# Altium PCB MSPCamLoRaShield.PcbDoc
Units mil, origin at the board's own origin, x right, y up, seen from the top; angles counter-clockwise.
Board outline 2295 x 2025 mil, 2 copper layers (Top Layer, Bottom Layer); 35 components, 40 nets, 166 pads, 20 vias.
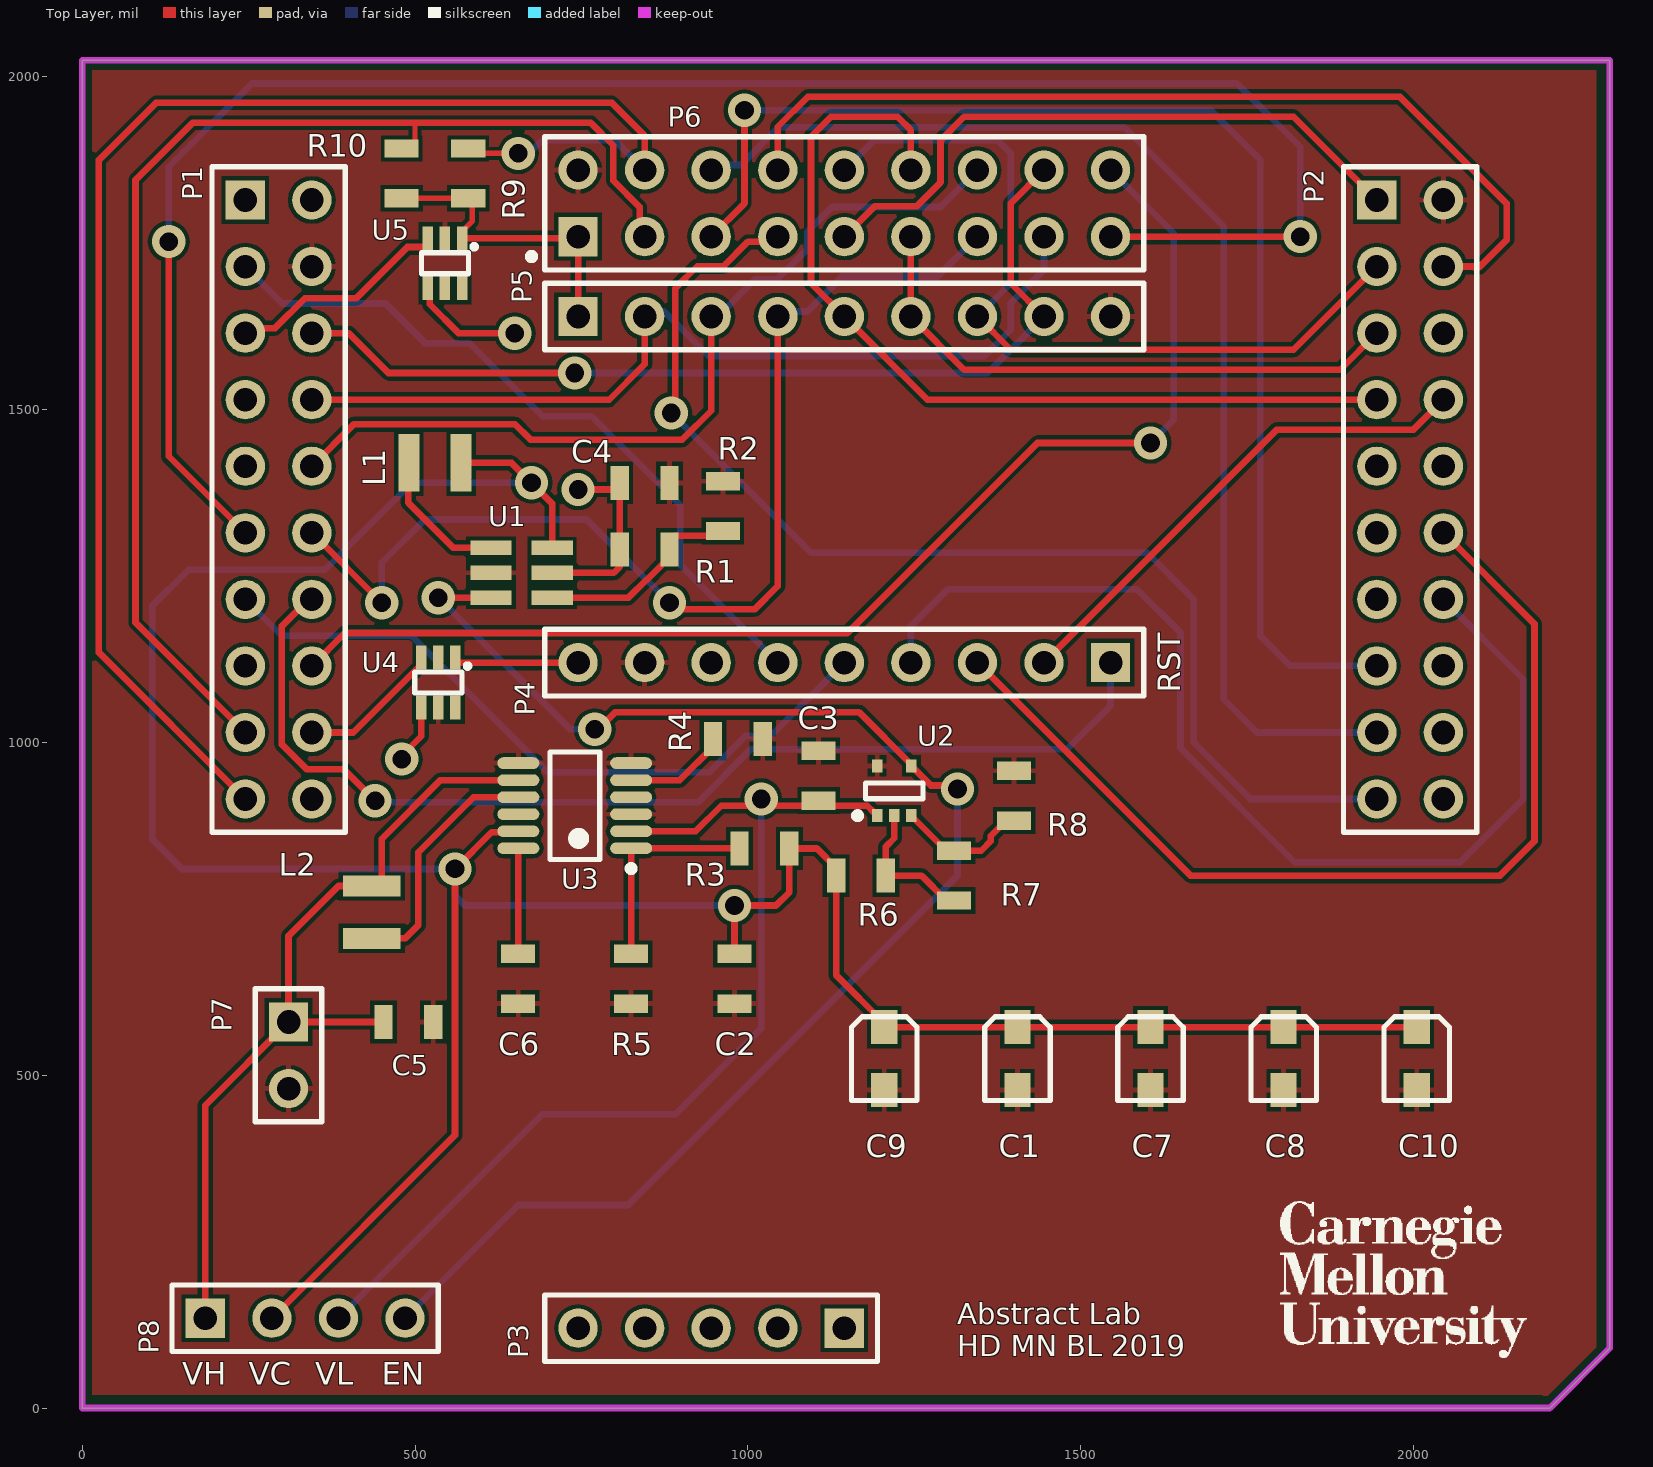
[diagram p0: Top Layer view]
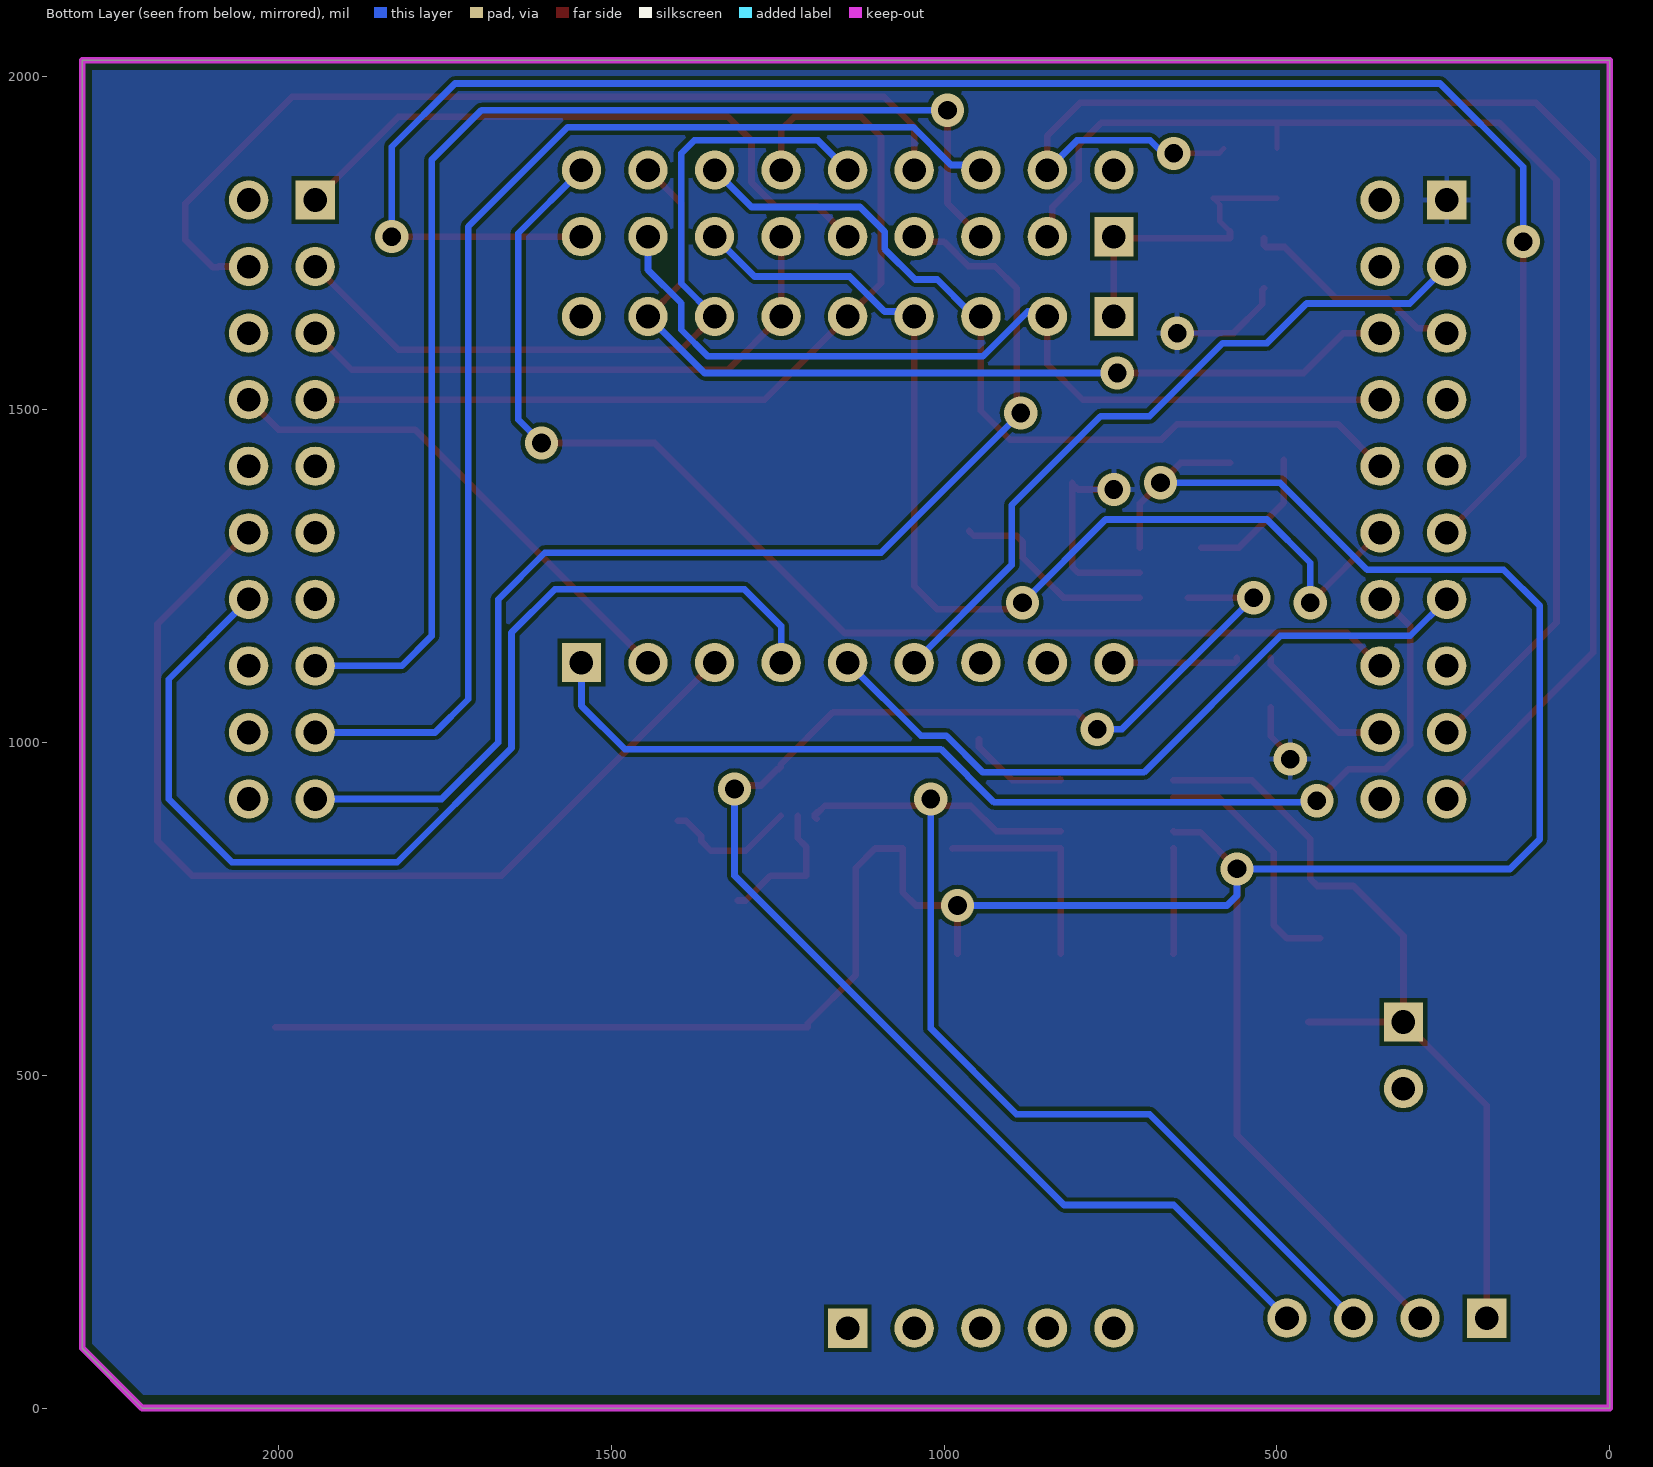
[diagram p1: Bottom Layer view, seen from below]

## Layer stack, top to bottom
Top Solder: solder mask 0.4, Solder Resist, Dk 3.5
Top Layer: signal copper 1.4
Dielectric 1: dielectric 12.6, FR-4, Dk 4.8
Bottom Layer: signal copper 1.4
Bottom Solder: solder mask 0.4, Solder Resist, Dk 3.5

## Board outline
0,2025 2295,2025 2295,90 2205,0 0,0

## Design rules (kind name [scope] priority, off if disabled: settings)
BoardOutlineClearance [All] p1: gap=15 ignorepadtopadclearanceinfootprint=FALSE
Clearance [All] p1: gap=6 ignorepadtopadclearanceinfootprint=FALSE except(0: Arc-Hole Track-Hole SMDPad-Hole THPad-Hole Via-Hole Fill-Hole Poly-Hole Region-Hole Text-Hole)
ComponentClearance [All] p1: gap=1 collisioncheckmode=3 verticalgap=1 showdistances=FALSE
DiffPairsRouting [All] p1: maxlimit=393.7 minlimit=6 mostfreqgap=8 toplayer_minwidth=6 toplayer_maxwidth=15 toplayer_prefwidth=8 bottomlayer_minwidth=6 bottomlayer_maxwidth=15 bottomlayer_prefwidth=8 maxuncoupledlength=500
HoleSize [All] p1: absolutevalues=TRUE maxlimit=265 minlimit=13 maxpercent=80.000 minpercent=20.000
HoleToHoleClearance [All] p1: gap=10 allowstackedmicrovias=FALSE
MinimumAnnularRing [All] p1: minimumring=7
MinimumSolderMaskSliver [All] p1: minsoldermaskwidth=0
PlaneClearance [All] p1: clearance=10
PlaneConnect [All] p1: planeconnectstyle=Direct reliefexpansion=16 reliefentries=4 reliefconductorwidth=6 reliefairgap=6
PolygonConnect [All] p1: connectstyle=Relief reliefconductorwidth=8 reliefentries=4 polygonreliefangle="90 Angle" airgapwidth=6
RoutingCorners [All] p1: cornerstyle=45-Degree minsetback=49.21 maxsetback=49.21
RoutingVias [All] p1: holewidth=15 width=30 viastyle="Through Hole" minholewidth=13 minwidth=27 maxholewidth=100 maxwidth=114
SilkToSilkClearance [All] p1: silktosilkclearance=0
SilkToSolderMaskClearance [IsPad] p1: minsilkscreentomaskgap=6 clearancetoexposedcopper=TRUE
SolderMaskExpansion [All] p1: expansion=2.95
Width [All] p1: maxlimit=400 minlimit=6 preferedwidth=8
20 further rules are at their usual default settings.

## Classes and differential pairs
component class ShieldConnections: P1 P2 P3 P4 P5 P6 R9 R10 U4 U5
component class Power: C1 C2 C3 C4 C5 C6 C7 C8 C9 C10 L1 L2 P7 P8 R1 R2 R3 R4 R5 R6 R7 R8 U1 U2 U3

## Components (designator, comment, footprint, x,y, rotation, side; value= is the part's Value field where it differs from the comment)
C1 "Cap - Polarized" CAP_CPH3225A 1405,525 r270 top value=7.5mF
C2 "Cap" 0805 980,645 r90 top value=10uF
C3 "Cap" 0805 1106.38,950 r270 top value=4.7uF
C4 "Cap" 0805 845,1390 r180 top value=10uF
C5 "Cap" 0805 490,580 r180 top value=10uF
C6 "Cap" 0805 655,645 r90 top value=1uF
C7 "Cap - Polarized" CAP_CPH3225A 1605,525 r270 top value=7.5mF
C8 "Cap - Polarized" CAP_CPH3225A 1805,525 r270 top value=7.5mF
C9 "Cap - Polarized" CAP_CPH3225A 1205,525 r270 top value=7.5mF
C10 "Cap - Polarized" CAP_CPH3225A 2005,525 r270 top value=7.5mF
L1 "Ind" 1008 530,1420 r180 top value=4.7uH
L2 "Ind" 1008 435,745 r270 top value=10uH
P1 "Header 10X2A" HDR2X10_CEN 245,1815 r270 top
P2 "Header 10X2A" HDR2X10_CEN 1945,1815 r270 top
P3 "Header 5" HDR1X5 1145,120 r180 top
P4 "Header 9" HDR1X9 1545,1120 r180 top
P5 "Header 9" HDR1X9 745,1640 r0 top
P6 "Header 9X2A" HDR2X9_CEN 745,1760 r0 top
P7 "Header 2" HDR1X2 310,580 r270 top
P8 "Header 4" HDR1X4 185,135 r0 top
R1 "Res" 0805 845,1290 r180 top value=1k
R2 "Res" 0805 962.5,1355 r270 top value=1k
R3 "Res" 0805 1025,840.67 r180 top value=1k
R4 "Res" 0805 985,1005 r0 top value=40.2k
R5 "Res" 0805 824.65,645 r270 top value=1k
R6 "Res" 0805 1170,800 r180 top value=1k
R7 "Res" 0805 1310,800 r270 top value=1k
R8 "Res" 0805 1400,920 r270 top value=1k
R9 "Res" 0805 580,1855 r270 top value=2.2k
R10 "Res" 0805 480,1855 r270 top value=2.2k
U1 "TPS61070DDCR" DDC0006A_N 660,1255 r0 top
U2 "MIC841" SC-70-5 1260,872.4 r90 top
U3 "LTC3105EMS#PBF" LT-MS-12_N 740,905 r180 top
U4 "SIP32413" SC70-6 535,1090 r180 top
U5 "SIP32413" SC70-6 545,1720 r180 top

## Footprints (in the part's own frame and the unit in brackets; to place one, negate y for a bottom-side part, rotate by r counter-clockwise, add the part's x,y. Pads: shape width x height; smd on the part's side, far side on the other; paste and mask are expansions set on the pad)
0805 [mm] "Surface Mount; Body 2.0 x 1.25 mm (LxW typ)"
  rect 0.7x1.3 smd: 1(-0.95,0) 2(0.95,0)
  body extent -1,-0.63 1,0.63, height 1.25
1008 [mm] "Surface Mount; Body 2.0 x 1.25 mm (LxW typ)"
  rect 0.8x2.2 smd: 1(-1,0) 2(1,0)
  body extent -1.4,-1.14 1.4,1.14, height 1.25
CAP_CPH3225A [mm]
  rect 1.3x1 smd: 1(-1.2,0) 2(1.2,0)
  silkscreen extent -1.6,-1.25 1.6,1.25
DDC0006A_N [mil]
  rect 62x22 smd: 1(-46,37.4) 2(-46,0) 3(-46,-37.4) 4(46,-37.4) 5(46,0) 6(46,37.4)
HDR1X2 [mm] "Connector; Header; 2 Position"
  rect 1.5x1.5 hole 0.9: 1(0,0)
  round 1.5 hole 0.9: 2(2.54,0)
  silkscreen extent -1.27,-1.27 3.81,1.27
HDR1X4 [mm] "Connector; Header; 4 Position"
  rect 1.5x1.5 hole 0.9: 1(0,0)
  round 1.5 hole 0.9: 2(2.54,0) 3(5.08,0) 4(7.62,0)
  silkscreen extent -1.27,-1.27 8.89,1.27
HDR1X5 [mm] "Connector; Header; 5 Position"
  rect 1.5x1.5 hole 0.9: 1(0,0)
  round 1.5 hole 0.9: 2(2.54,0) 3(5.08,0) 4(7.62,0) 5(10.16,0)
  silkscreen extent -1.27,-1.27 11.43,1.27
HDR1X9 [mm] "Connector; Header; 9 Position"
  rect 1.5x1.5 hole 0.9: 1(0,0)
  round 1.5 hole 0.9: 2(2.54,0) 3(5.08,0) 4(7.62,0) 5(10.16,0) 6(12.7,0) 7(15.24,0) 8(17.78,0) 9(20.32,0)
  silkscreen extent -1.27,-1.27 21.59,1.27
HDR2X9_CEN [mm] "Connector; Header; 9x2 Position"
  rect 1.5x1.5 hole 0.9: 1(0,0)
  round 1.5 hole 0.9: 2(2.54,0) 3(5.08,0) 4(7.62,0) 5(10.16,0) 6(12.7,0) 7(15.24,0) 8(17.78,0) 9(20.32,0) 10(0,2.54) 11(2.54,2.54) 12(5.08,2.54) 13(7.62,2.54) 14(10.16,2.54) 15(12.7,2.54) 16(15.24,2.54) 17(17.78,2.54) 18(20.32,2.54)
  silkscreen extent -1.27,-1.27 21.59,3.81
HDR2X10_CEN [mm] "Connector; Header; 10x2 Position"
  rect 1.5x1.5 hole 0.9: 1(0,0)
  round 1.5 hole 0.9: 2(2.54,0) 3(5.08,0) 4(7.62,0) 5(10.16,0) 6(12.7,0) 7(15.24,0) 8(17.78,0) 9(20.32,0) 10(22.86,0) 11(0,2.54) 12(2.54,2.54) 13(5.08,2.54) 14(7.62,2.54) 15(10.16,2.54) 16(12.7,2.54) 17(15.24,2.54) 18(17.78,2.54) 19(20.32,2.54) 20(22.86,2.54)
  silkscreen extent -1.27,-1.27 24.13,3.81
LT-MS-12_N [mm] "SOP, 12-Leads, Body 4.1x3.1mm, Pitch 0.65mm, IPC Medium Density"
  oval 1.6x0.45 smd: 1(-2.15,1.625) 2(-2.15,0.975) 3(-2.15,0.325) 4(-2.15,-0.325) 5(-2.15,-0.975) 6(-2.15,-1.625) 7(2.15,-1.625) 8(2.15,-0.975) 9(2.15,-0.325) 10(2.15,0.325) 11(2.15,0.975) 12(2.15,1.625)
  silkscreen extent -2.28,-2.05 0.95,2.52, body extent -1.55,-2.05 1.55,2.05, height 1.1
SC70-6 [mm] "SC70-6"
  rect 0.4x0.92 smd: 1(-0.65,-0.95) 2(0,-0.95) 3(0.65,-0.95) 4(0.65,0.95) 5(0,0.95) 6(-0.65,0.95)
  silkscreen extent -1.2,-0.71 0.9,0.4, body extent -0.9,-0.4 0.9,0.4, height 1.1
SC-70-5 [mm]
  rect 0.5x0.4 smd: 1(0.447,1.666) 2(0.447,1.016) 3(0.447,0.366) 4(2.347,0.366) 5(2.347,1.666)
  silkscreen extent 0.32,-0.08 1.7,2.54, body extent 0.2,-0.08 2.6,2.12, height 1.1

## Part data
C1 C7 C8 C9 C10: "Polarized Capacitor"
C2 C3 C4 C5 C6: "Ceramic Capacitor (Surface Mount)", Manufacturer="Generic Ceramic Chip Cap (TBD)"
L1 L2: library part "Ind - Power", "Power Inductor for DC-DC convters (RF switching freq)"
P1 P2: "Header, 10-Pin, Dual row", LatestRevisionDate=17-Jul-2002, LatestRevisionNote="Re-released for DXP Platform.", Publisher="Altium Limited"
P3: "Header, 5-Pin", LatestRevisionDate=17-Jul-2002, LatestRevisionNote="Re-released for DXP Platform.", Publisher="Altium Limited"
P4 P5: "Header, 9-Pin", LatestRevisionDate=17-Jul-2002, LatestRevisionNote="Re-released for DXP Platform.", Publisher="Altium Limited"
P6: "Header, 9-Pin, Dual row", LatestRevisionDate=17-Jul-2002, LatestRevisionNote="Re-released for DXP Platform.", Publisher="Altium Limited"
P7: "Header, 2-Pin", LatestRevisionDate=17-Jul-2002, LatestRevisionNote="Re-released for DXP Platform.", Publisher="Altium Limited"
P8: "Header, 4-Pin", LatestRevisionDate=17-Jul-2002, LatestRevisionNote="Re-released for DXP Platform.", Publisher="Altium Limited"
R1 R2 R3 R4 R5 R6 R7 R8 R9 R10: "Chip Resistor (Surface Mount)", Manufacturer="Generic Chip Res (TBD)"
U1: Manufacturer="Texas Instruments", Package=DDC0006A_N, PartNumber=TPS61070DDC, COMPTYPE=IC, DeviceSetName=TPS61070DDCR, GateName_1=A, LibraryName=TPS61070, MOUNTTYPE=SMT, PackageReference=DDC0006A, PIN_COUNT=6, REFDES=RefDes, RoHS=Y, SymbolName_1=TPS61070DDC, TYPE=TYPE
U3: library part CMP-0473-00104-1, "400 mA Step-Up DC/DC Converter with Maximum Power Point Control and 250 mV Start-Up, 12-pin SOP (MS-12), -40 to 85 degC, Pb-Free", Manufacturer="Linear Technology", ComponentLink1Description="Manufacturer URL", ComponentLink1URL=http://www.linear.com/, ComponentLink2Description=Datasheet, ComponentLink2URL=http://cds.linear.com/docs/en/datasheet/3105fa.pdf, ComponentLink3Description="Package Specification", ComponentLink3URL=http://cds.linear.com/docs/en/packaging/05081668_A_MS12.pdf, DatasheetVersion="Rev. A", Energy Source=Solar, Mounting Technology="Surface Mount", Number of Outputs=1, PackageDescription="12-Pin Plastic MSOP, Body 4.039 x 3 mm, Pitch 0.65 mm", PackageReference=MS-12, PackageVersion="Rev. A, 05/2013", PartNumber=LTC3105EMS#PBF, RoHS=TRUE, Topology=Boost, Vin Max(V)=5, Vin Min(V)=0.225, Vout Max(V)=5.25
U4 U5: library part SIP32431
U2: Name=MIC841

## Via types
v1: diameter 50, hole 28, Top Layer to Bottom Layer, 20 vias

## Nets (pads, with @x,y where several pads share a name; then routed paths per layer and width w, separated by ;. In a path a pad name is that pad's centre, name@x,y a point inside that pad or via, vN(x,y) a via of type N, cw(c..) or ccw(c..) an arc to the next point about the centre after c; other vN are vias at no path point)
CAMERAVCC: P5.1 P6.1 R9.2 R10.2 U5.1 | length 471
  Top Layer w8: R10.2@500,1817.6 595.56,1817.6 585.78,1807.82 585.78,1782.83 U5.1@570.59,1767.64 ; R9.2@570.56,1817.6 R9.2
  Top Layer w10: U5.1@570.59,1767.64 U5.1 742.4,1757.4 P6.1 P5.1
GND: C1.2 C2.1 C3.1 C4.1 C5.1 C6.1 C7.2 C8.2 C9.2 C10.2 P1.12 P2.11 P4.8 P5.9 P6.10 P7.2 R2.1 R4.2 R5.2 R8.1 U1.2 U2.5 U3.3 U3.6 U3.7 U4.2 U4.5 U5.2 U5.5
IPBoost-FB: R3.2 R5.1 U3.1 | length 321.7
  Top Layer w10: R5.1 U3.1 987.24,841.02 R3.2
IPBoost-MPPC: R4.1 U3.5 | length 157.5
  Top Layer w10: U3.5@826.12,944.86 U3.5 897.8,943.39 947.6,993.19 R4.1
NetC6_2: C6.2 U3.12 | length 159.3
  Top Layer w10: C6.2@655.35,682.76 C6.2 655,840.67 U3.12
NetL2_2: L2.2 U3.9 | length 372.3
  Top Layer w10: L2.2 485,705.63 505,725.63 505,835 587.8,917.8 U3.9
NetR6_1: R6.1 R7.2 U2.2 | length 213.3
  Top Layer w10: U2.2 1220,856.14 1207.4,843.54 R6.1 1260.79,800 1298.19,762.6 R7.2
NetR7_1: R7.1 R8.2 U2.3 | length 199.4
  Top Layer w10: U2.3 1298.19,837.4 R7.1 1350.59,837.4 1365,851.81 1365,859.41 1388.19,882.6 R8.2
OPBoostFB: R1.1 R2.2 U1.4 | length 311.8
  Top Layer w10: U1.4 820.78,1217.6 847.59,1244.41 848.62,1244.41 882.4,1278.19 R1.1 882.4,1301.81 891.18,1310.59 955.49,1310.59 R2.2
OPBoostSW: L1.2 U1.1 | length 217
  Top Layer w10: L1.2@490,1425 490,1360 557.6,1292.4 U1.1
P1.2: P1.2 P4.6 | length 1099.2
  Bottom Layer w10: P1.2 300.47,1659.53 455.47,1659.53 515,1600 581.57,1600 691.57,1490 765,1490 898.59,1356.41 898.59,1266.41 P4.6
P1.3: P1.6 P6.9 | length 2808.8
  Top Layer w10: v1(130,1752.5) 130,1430 P1.6 ; P6.9 v1(1830,1760)
  Bottom Layer w10: v1(130,1752.5) 130,1865 255,1990 1735,1990 1830,1895 v1(1830,1760)
P1.4: P1.17 P4.1 | length 1645.6
  Top Layer w10: P1.17 340,1215 300,1175 300,997.03 337.5,959.53 393.07,959.53 v1(440,912.6)
  Bottom Layer w10: v1(440,912.6) 447.4,912.6 450,910 925,910 1005,990 1480,990 1545,1055 P4.1
P1.5: P1.18 P6.18 | length 1862.6
  Top Layer w10: P1.18 394.53,1164.53 1149.53,1164.53 1435,1450 v1(1605,1450)
  Bottom Layer w10: P6.18 1640,1765 1640,1485 v1(1605,1450)
P3.0: P1.13 P5.8 P6.17 | length 1421.5
  Top Layer w10: P1.13 400,1615 460,1555 v1(740,1555) ; P5.8 1395,1690 1395,1810 P6.17
  Bottom Layer w10: v1(740,1555) 1360,1555 P5.8
P3.1: P1.14 P5.2 P6.8 | length 1352.1
  Top Layer w10: P1.14 791.72,1515 845,1568.28 P5.2
  Bottom Layer w10: P5.2 852.5,1647.5 874.53,1647.5 942.03,1580 1355,1580 1395,1620 1395,1660 1445,1710 P6.8
P3.2: P1.15 P5.3 P6.16 | length 1301.8
  Top Layer w10: P1.15 408.31,1478.31 649.92,1478.31 673.23,1455 901.57,1455 945,1498.43 P5.3
  Bottom Layer w10: P5.3 952.5,1647.5 962.5,1647.5 1010.47,1695.47 1043.44,1695.47 1089.53,1741.56 1089.53,1767.5 1126.56,1804.53 1289.53,1804.53 P6.16
P3.3: P1.16 P5.4 P6.7 | length 1668.8
  Top Layer w10: P1.16 v1(450,1210) ; v1(882.4,1210) 892.4,1200 1010,1200 1045,1235 P5.4 ; P6.7@1345,1746.73 P6.7
  Bottom Layer w10: v1(450,1210) 450,1270 515,1335 757.4,1335 v1(882.4,1210) ; P5.4 1052.5,1647.5 1089.53,1647.5 1142.03,1700 1285,1700 P6.7
P3.4: P2.4 P5.5 P6.15 | length 1373.2
  Top Layer w10: P6.15 1245,1920 1225,1940 1125,1940 1095,1910 1095,1690 P5.5 1270,1515 P2.4
P3.5: P2.3 P5.6 P6.6 | length 875.9
  Top Layer w10: P6.6 P5.6 1325,1560 1890,1560 P2.3
P3.6: P2.2 P5.7 P6.14 | length 1214.7
  Top Layer w10: P5.7 1395,1590 1820,1590 P2.2
  Bottom Layer w10: P6.14 1189.53,1904.53 1375.47,1904.53 1395,1885 1395,1690 P5.7
P3.7: P2.1 P6.5 | length 963.2
  Top Layer w10: P6.5 1190.47,1805.47 1253.44,1805.47 1289.53,1841.56 1289.53,1904.53 1325,1940 1820,1940 P2.1
P4.1: P2.10 P6.4 | length 1802.2
  Top Layer w10: v1(885,1495) 891.18,1501.18 891.18,1682.6 924.06,1715.47 963.44,1715.47 1000.47,1752.5 1037.5,1752.5 P6.4
  Bottom Layer w10: v1(885,1495) 1095,1285 1600,1285 1670,1215 1670,1000 1755,915 P2.10
P4.2: P2.9 P6.12 | length 1819.4
  Bottom Layer w10: P6.12 952.5,1867.5 989.53,1867.5 1046.56,1924.53 1565.47,1924.53 1715,1775 1715,1065 1765,1015 P2.9
P4.3: P2.8 P6.3 | length 1925.4
  Top Layer w10: P6.3 995,1810 v1(995,1950)
  Bottom Layer w10: v1(995,1950) 1695,1950 1770,1875 1770,1160 1815,1115 P2.8
P4.7: P1.19 U4.3 | length 217
  Top Layer w10: P1.19 407.24,1015 509.41,1117.17 U4.3
P5.0: P2.16 P4.3 | length 1510.7
  Top Layer w10: P4.3 1665,800 2130,800 2181.81,851.81 2181.81,1178.19 P2.16
P5.1: P2.17 P4.4 | length 1658.2
  Bottom Layer w10: P4.4 1245,1175 1300,1230 1585,1230 1650,1165 1650,991.72 1821.72,820 2070,820 2165,915 2165,1095 P2.17
P5.2: P1.7 P4.5 | length 1076
  Bottom Layer w10: P1.7 299.69,1160.31 494.69,1160.31 700,955 941.72,955 996.72,1010 1035,1010 P4.5
P5.3: P2.14 P4.2 | length 763.6
  Top Layer w10: P4.2 1795,1470 2000,1470 P2.14
P5.7: P2.12 P6.13 | length 1412.2
  Top Layer w10: P6.13 1045,1925 1090,1970 1980,1970 2140,1810 2140,1755 2099.14,1714.14 2090.86,1714.14 2090,1715 P2.12
P6.1: P1.3 U5.3 | length 339.4
  Top Layer w10: P1.3 252.5,1622.5 289.53,1622.5 334.22,1667.19 411.45,1667.19 488.54,1744.29 516.54,1744.29 519.41,1747.17 U5.3
P7.0: P1.10 P6.11 R9.1 | length 2288.4
  Top Layer w8: R9.1 587.4,1885 v1(655,1885)
  Top Layer w10: P1.10 25,1135 25,1875 110.86,1960.86 795.86,1960.86 845,1911.72 P6.11 ; v1@635,1885 v1(655,1885)
  Bottom Layer w10: v1@660,1885 670.82,1885 690.35,1904.53 800.47,1904.53 P6.11
P7.1: P1.9 P6.2 R10.1 | length 1860.9
  Top Layer w8: R10.1@500,1892.4 500,1930.86
  Top Layer w10: P1.9 80,1180 80,1845 165.86,1930.86 500,1930.86 764.14,1930.86 797.81,1897.19 797.81,1844.22 837.5,1804.53 837.5,1767.5 P6.2
RADIOVCC: P4.9 U4.1 | length 190.1
  Top Layer w10: U4.1 560.59,1122.87 563.46,1120 P4.9
TPSEnable: P8.4 U1.3 U2.4 | length 2257.1
  Top Layer w10: v1(535,1217.6) U1.3 U1.3@634,1217.6 ; v1(770,1020) 775.39,1020 800.98,1045.59 1166.77,1045.59 1245.59,966.77 U2.4 1245.59,962.83 1248.46,959.96 1250.43,959.96 1275,935.39 1309.61,935.39 v1(1315,930)
  Bottom Layer w10: P8.4 655,305 820,305 1315,800 v1(1315,930) ; v1(535,1217.6) 732.6,1020 v1(770,1020)
VCAP: C1.1 C2.2 C7.1 C8.1 C9.1 C10.1 L1.1 P8.2 R3.1 R6.2 U1.6 U3.11 | length 4452.7
  Top Layer w10: P8.2 560,410 v1(560,810) 615.14,865.14 653.88,865.14 U3.11 ; L1.1@570,1420 645,1420 v1(675,1390) 706,1359 U1.6 ; C2.2 v1(980,755) 1042.4,755 1062.4,775 R3.1 1103.74,840.67 1132.6,811.81 R6.2 1132.6,650.55 1205,578.15 C9.1 C1.1 C7.1 C8.1 C10.1
  Bottom Layer w10: v1(675,1390) 495,1390 364.53,1259.53 159.53,1259.53 105,1205 105,855 150,810 v1(560,810) 560,770 575,755 v1(980,755)
Vcc: C4.2 P1.1 R1.2 U1.5 U4.4 U5.4 | length 558.7
  Top Layer w10: v1(480,975) 480,980 509.41,1009.41 U4.4 ; U5.4 522.13,1679.88 522.13,1658.27 565.4,1615 v1(650,1615) ; U1.5 798.82,1255 807.6,1263.78 R1.2 C4.2@807.6,1388.78 ; v1(745,1380) 798.82,1380 C4.2@807.6,1388.78 ; C4.2 C4.2@807.6,1388.78
VHarvest: C5.2 L2.1 P7.1 P8.1 U3.8 | length 1246.1
  Top Layer w10: P8.1 185,455 P7.1 ; C5.2 P7.1 ; U3.8 538.39,943.39 450,855 450,795.12 439.25,784.37 L2.1 385,784.37 310,709.37 P7.1
VLDO: C3.2 P8.3 U2.1 U3.2 | length 1571.3
  Top Layer w10: U3.2 921.61,866.61 960,905 v1@1015,905 ; v1(1020,915) 1015,910 v1@1015,905 ; U2.1@1191.54,885.16 1194.41,888.03 U2.1 1194.41,891.97 1191.54,894.84 1189.57,894.84 1179.41,905 v1@1015,905
  Bottom Layer w10: P8.3 691.41,441.41 891.41,441.41 1020,570 v1(1020,915)
pads on no net: P1.4 P1.5 P1.8 P1.11 P1.20 P2.5 P2.6 P2.7 P2.13 P2.15 P2.18 P2.19 P2.20 P3.1 P3.2 P3.3 P3.4 P3.5 P4.7 U3.4 U3.10 U4.6 U5.6

## Polygon pours and split planes (outlines as drawn)
Vcc on Bottom Layer "Bottom Layer-No Net" (solid, pour order 2): 4.98,2015 2280,2015 2280,80 2220,20 0,20
GND on Top Layer "Top Layer-No Net" (solid, pour order 0): 10,2010 2275,2010 2275,91.67 2198.77,15 2193.83,19.96 10,19.96

## Keep-outs
Keep-Out Layer:
  lines w10: 0,2025 0,0 2205,0 2295,90 2295,2025 0,2025 ; 0,2025 0,2025

## Silkscreen, mask and mechanical layers (free items; w line width, h text height)
Top Overlay:
  drawing of 1894 lines, arcs and shapes, not listed
  text "RST" at 1650,1075 h34 r90
  text "Abstract Lab / HD MN BL 2019" at 1315,78 h32
  text "VH" at 150,35 h34
  text "VC" at 250,35 h34
  text "VL" at 350,35 h34
  text "EN" at 450,35 h34
Drill Drawing:
  lines w1: 1944,268 1956,268

## Dimensions
0,2025 to 2295,2025 on Drill Drawing

## Text inside footprints (layer, text, board x,y; h text height)
U1: Mechanical 7 "TPS61070" at 591,1343 h40